# Altium PCB Leaf_Adapter.PcbDoc
Units mil, origin at the board's own origin, x right, y up, seen from the top; angles counter-clockwise.
Board outline 6220.47 x 4173.23 mil, 2 copper layers (Top Layer, Bottom Layer); 19 components, 19 nets, 157 pads, 11 vias.
Unrouted connection lines stored in the file: 5.
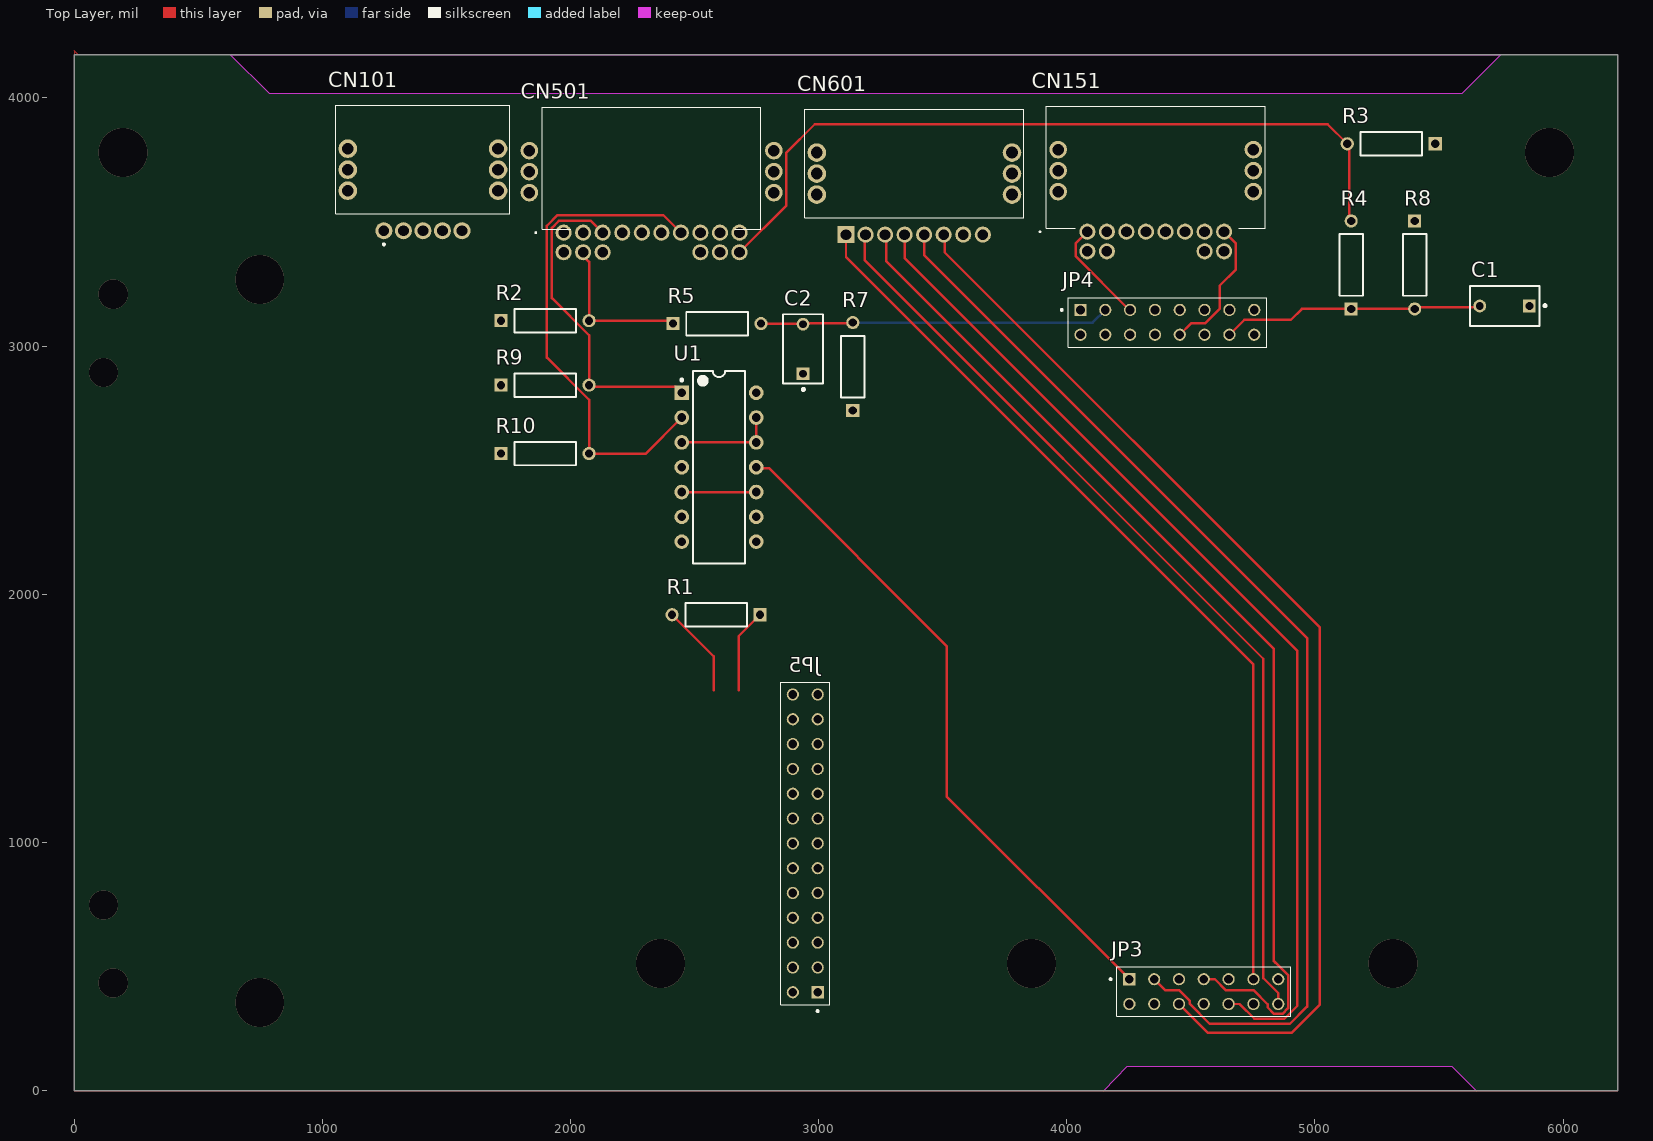
[diagram p0: Top Layer view]
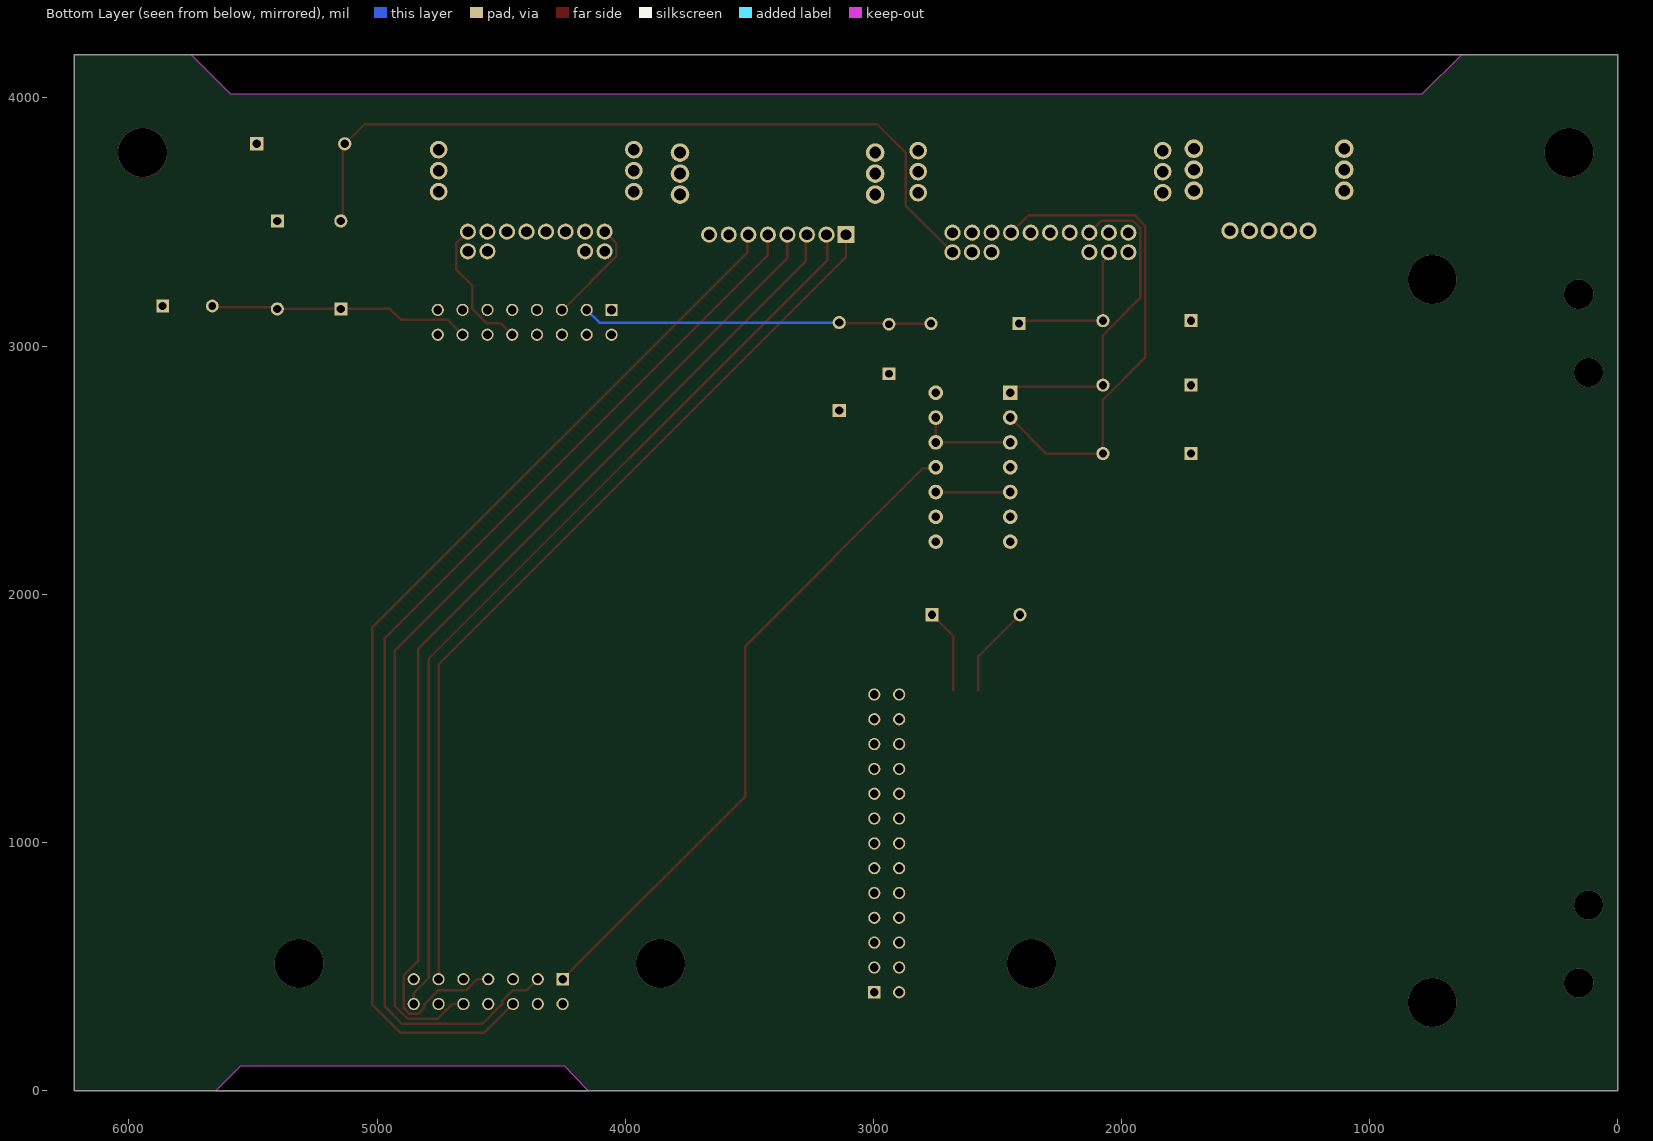
[diagram p1: Bottom Layer view, seen from below]

## Layer stack, top to bottom
Top Solder: solder mask 0.4, Solder Resist, Dk 3.5
Top Layer: signal copper 1.4
Dielectric 1: dielectric 12.6, FR-4, Dk 4.8
Bottom Layer: signal copper 1.4
Bottom Solder: solder mask 0.4, Solder Resist, Dk 3.5

## Board outline
0,0 6220.47,0 6220.47,4173.23 0,4173.23
cut-out: 4149.61,0 4244.09,98.43 5551.18,98.43 5649.61,0
cut-out: 787.4,4015.75 629.92,4173.23 5748.03,4173.23 5590.55,4015.75

## Design rules (kind name [scope] priority, off if disabled: settings)
Clearance [All] p1: gap=10 ignorepadtopadclearanceinfootprint=FALSE except(0: Arc-Hole Track-Hole SMDPad-Hole THPad-Hole Via-Hole Fill-Hole Poly-Hole Region-Hole Text-Hole)
PolygonConnect [All] p1: connectstyle=Relief reliefconductorwidth=10 reliefentries=4 polygonreliefangle="90 Angle" airgapwidth=10
RoutingVias [All] p1: holewidth=28 width=50 viastyle="Through Hole" minholewidth=28 minwidth=50 maxholewidth=28 maxwidth=50
SolderMaskExpansion [All] p1: expansion=4 istentingtop=FALSE
Width [All] p1: maxlimit=10 minlimit=10 preferedwidth=10
30 further rules are at their usual default settings.

## Components (designator, comment, footprint, x,y, rotation, side; value= is the part's Value field where it differs from the comment)
C1 "C330C105M5U5TA" KEMT-C330C105M5U5TA 5763.78,3161.42 r180 top
C2 "C330C105M5U5TA" KEMT-C330C105M5U5TA 2937.01,2988.19 r90 top
CN101 "GT8E-5P-DS" GT8E5PDS 1248.03,3464.57 r180 top
CN151 "GT8E-12DP-DS" GT8E12DPDS 4082.68,3460.63 r180 top
CN501 "GT8E-16DP-DS" GT8E16DPDS 2326.77,3456.69 r180 top
CN601 "GT8E-8P-DS" GT8E8PDS 3110.24,3448.82 r180 top
JP3 "215309-7" TE_215309-7 4251.97,448.82 r0 top
JP4 "215307-8" TE_215307-8 4055.12,3145.67 r0 top
JP5 "1-215309-3" TE_1-215309-3 2996.06,396.06 r90 top
R1 "MRS25000C1200FC100" RESA60-630X240 2586.61,1917.32 r180 top
R2 "MFR-25FBF5210K" RESA60-630X240 1897.64,3102.36 r0 top
R3 "MFR-25FBF5210K" RESA60-630X240 5307.09,3814.96 r180 top
R4 "MFR-25FBF5210K" RESA60-630X240 5145.67,3326.77 r90 top
R5 "MFR-25FBF5210K" RESA60-630X240 2590.55,3090.55 r0 top
R7 "MRS25000C4702FC100" RESA60-630X240 3137.8,2917.32 r90 top
R8 "MRS25000C4702FC100" RESA60-630X240 5401.57,3326.77 r270 top
R9 "MFR-25FBF52-1K" RESA60-630X240 1897.64,2842.52 r0 top
R10 "MFR-25FBF52-1K" RESA60-630X240 1897.64,2566.93 r0 top
U1 "SN74LS00N" N0014A 2598.43,2511.81 r0 top

## Footprints (in the part's own frame and the unit in brackets; to place one, negate y for a bottom-side part, rotate by r counter-clockwise, add the part's x,y. Pads: shape width x height; smd on the part's side, far side on the other; paste and mask are expansions set on the pad)
GT8E5PDS [mm]
  round 1.75 hole 1.1: 1(0,0) 2(-2,0) 3(-4,0) 4(-6,0) 5(-8,0)
  round 1.9 hole 1.2: 6(3.69,-4.1) 7(3.69,-6.25) 8(3.69,-8.4) 9(-11.69,-4.1) 10(-11.69,-6.25) 11(-11.69,-8.4)
  silkscreen extent -12.9,-12.85 4.9,1.5, body extent -12.9,-12.85 4.9,0.45, height 7.1
GT8E8PDS [mm]
  rect 1.75x1.75 hole 1.1: 1(0,0)
  round 1.65 hole 1.1: 2(-2,0) 3(-4,0) 4(-6,0) 5(-8,0) 6(-10,0) 7(-12,0) 8(-14,0)
  round 1.9 hole 1.2: 9(2.99,-4.1) 10(2.99,-6.25) 11(2.99,-8.4) 12(-16.99,-4.1) 13(-16.99,-6.25) 14(-16.99,-8.4)
  silkscreen extent -18.2,-12.85 4.2,-1.75, body extent -18.2,-12.85 4.2,0.45, height 7.1
GT8E12DPDS [mm]
  round 1.65 hole 1.1: 1(0,0) 2(-2,0) 3(-4,0) 4(-6,0) 5(-8,0) 6(-10,0) 7(-12,0) 8(-14,0) 9(0,2) 10(-2,2) 11(-12,2) 12(-14,2)
  round 1.8 hole 1.2: MH1(2.99,-8.4) MH2(2.99,-6.25) MH3(2.99,-4.1) MH4(-16.99,-8.4) MH5(-16.99,-6.25) MH6(-16.99,-4.1)
  silkscreen extent -18.2,-12.85 4.9,0.05, body extent -18.2,-12.85 4.2,2.45, height 10.6
GT8E16DPDS [mm]
  round 1.65 hole 1.1: 1(9,0) 2(7,0) 3(5,0) 4(3,0) 5(1,0) 6(-1,0) 7(-3,0) 8(-5,0) 9(-7,0) 10(-9,0) 11(9,2) 12(7,2) 13(5,2) 14(-5,2) 15(-7,2) 16(-9,2)
  round 1.8 hole 1.2: MH1(12.515,-8.4) MH2(12.515,-6.25) MH3(12.515,-4.1) MH4(-12.515,-8.4) MH5(-12.515,-6.25) MH6(-12.515,-4.1)
  silkscreen extent -11.2,-12.85 11.9,0.05, body extent -13.65,-12.9 13.65,-0.3, height 10.5
KEMT-C330C105M5U5TA [mm] "THD, 2-Leads, Body 7.11x4.07mm"
  rect 1.3x1.3 hole 0.8: 1(-2.54,0)
  round 1.3 hole 0.8: 2(2.54,0)
  silkscreen extent -4.27,-2.03 3.55,2.03, body extent -3.55,-2.03 3.55,2.03, height 9.14
N0014A [mm] "DIP, 14-Leads, Body 19.7x6.6mm, Pitch 2.54mm"
  rect 1.5x1.5 hole 0.9: 1(-3.81,7.62)
  round 1.5 hole 0.9: 2(-3.81,5.08) 3(-3.81,2.54) 4(-3.81,0) 5(-3.81,-2.54) 6(-3.81,-5.08) 7(-3.81,-7.62) 8(3.81,-7.62) 9(3.81,-5.08) 10(3.81,-2.54) 11(3.81,0) 12(3.81,2.54) 13(3.81,5.08) 14(3.81,7.62)
  silkscreen extent -3.93,-9.85 2.65,9.85, body extent -3.95,-9.85 3.95,9.85, height 5.08
RESA60-630X240 [mm] "Axial Resistor, 2-Leads, Dia 2.4mm, Body Length 6.3mm"
  rect 1.35x1.35 hole 0.85: 1(-4.5,0)
  round 1.35 hole 0.85: 2(4.5,0)
  silkscreen extent -3.15,-1.2 3.15,1.2, body extent -3.15,-1.2 3.15,1.2, height 2.4
TE_1-215309-3 [mm]
  rect 1.25x1.25 hole 0.9: 1(0,0)
  round 1.25 hole 0.9: 2(0,2.54) 3(2.54,0) 4(2.54,2.54) 5(5.08,0) 6(5.08,2.54) 7(7.62,0) 8(7.62,2.54) 9(10.16,0) 10(10.16,2.54) 11(12.7,0) 12(12.7,2.54) 13(15.24,0) 14(15.24,2.54) 15(17.78,0) 16(17.78,2.54) 17(20.32,0) 18(20.32,2.54) 19(22.86,0) 20(22.86,2.54) 21(25.4,0) 22(25.4,2.54) 23(27.94,0) 24(27.94,2.54) 25(30.48,0) 26(30.48,2.54)
  silkscreen extent -2.02,-1.26 31.75,3.8, body extent -1.27,-1.26 31.75,3.8, height 8.5
TE_215307-8 [mm]
  rect 1.25x1.25 hole 0.9: 1(0,0)
  round 1.25 hole 0.9: 2(0,-2.54) 3(2.54,0) 4(2.54,-2.54) 5(5.08,0) 6(5.08,-2.54) 7(7.62,0) 8(7.62,-2.54) 9(10.16,0) 10(10.16,-2.54) 11(12.7,0) 12(12.7,-2.54) 13(15.24,0) 14(15.24,-2.54) 15(17.78,0) 16(17.78,-2.54)
  silkscreen extent -2.02,-3.8 19.05,1.26, body extent -1.26,-3.83 19.06,1.23, height 7
TE_215309-7 [mm]
  rect 1.25x1.25 hole 0.9: 1(0,0)
  round 1.25 hole 0.9: 2(0,-2.54) 3(2.54,0) 4(2.54,-2.54) 5(5.08,0) 6(5.08,-2.54) 7(7.62,0) 8(7.62,-2.54) 9(10.16,0) 10(10.16,-2.54) 11(12.7,0) 12(12.7,-2.54) 13(15.24,0) 14(15.24,-2.54)
  silkscreen extent -2.02,-3.8 16.51,1.26, body extent -1.27,-3.8 16.51,1.26, height 8.5

## Part data
C1 C2: library part CMP-2000-06056-1, "Ceramic Capacitor, 1 uF, +/- 20%, 50 V, -10 to 85 degC, 2-Pin THD, RoHS, Bulk", Capacitance=1µF, Manufacturer=Kemet, Operating Temperature=10°C~85°C, Package / Case=Radial, Package Description="2-Pin Through Hole Device, Body 7.11 x 4.07 mm", Ratings=-, Standard Package=250, Temperature Coefficient=Z5U, Tolerance=±20%, Voltage - Rated=50V, Applications=GeneralPurpose, Catalog Drawings=C330(std), Category=Capacitors, Datasheet URL=http://www.kemet.com/Lists/ProductCatalog/Attachments/599/KEM_C1051_GOLDMAX_Z5U.pdf, Datasheet Version=12/2015, Family=CeramicCapacitors, Features=-, Height - Seated (Max)="0.360\"(9.14mm)", Lead Spacing="0.200\"(5.08mm)", Lead Style=Straight, Manufacturer URL=http://www.kemet.com/, Mounting Technology=ThroughHole, Mounting Type=ThroughHole, Online Catalog=GoldenMax™Series, Other Names=399-4390, Package Reference=C330C105M5U5TA, Packaging=Bulk, PCN Design/Specification=C3yySeriesGoldenMaxLeadConfiguration02/Feb/2015, Product Training Modules=CapacitorBasics-TypicalUsesforCapacitors, Series=GoldenMax™, Size / Dimension="0.300\"Lx0.150\"W(7.62mmx3.81mm)", Thickness (Max)=-
CN101 CN151 CN601: "Connector", Manufacturer_Name=Hirose
  CN101: Datasheet Link=https://www.hirose.com/product/en/download_file/key_name/GT8E/category/Catalog/doc_file_id/49379/&file_category_id=4&item_id=35&is_series=1, Height=7mm, Manufacturer_Part_Number=GT8E-5P-DS
  CN151: Datasheet Link=https://www.hirose.com/product/document?clcode=&productname=&series=GT8E&documenttype=Catalog&lang=en&documentid=D49379_en, Height=10.5mm, Manufacturer_Part_Number=GT8E-12DP-DS
  CN601: Datasheet Link=https://www.mouser.co.uk/datasheet/2/185/GT8E_catalog-939506.pdf, Height=7mm, Manufacturer_Part_Number=GT8E-8P-DS
CN501: "Connector", Manufacturer_Name=Hirose, Manufacturer_Part_Number=GT8E-12DP-DS, Datasheet Link=https://www.hirose.com/product/document?clcode=&productname=&series=GT8E&documenttype=Catalog&lang=en&documentid=D49379_en, Height=10.5mm
JP3: "2X7P HV100 REC CON. TE, 8.5MM", Package=None, Availability=Unavailable, Centerline_Pitch="2.54 mm[.1 in]", EU_RoHS_Compliance=Compliant, MF="TE Connectivity", MP=215309-7, Number_of_Positions=7, Price=None, Product_Type=Connector, SnapEDA_Link=https://www.snapeda.com/parts/215309-7/TE%20Connectivity%20AMP%20Connectors/view-part/1233007/?ref=snap, TE_purchase_URL=https://www.te.com/usa-en/product-215309-7.html?te_bu=Cor&te_type=disp&te_campaign=seda_glo_cor-seda-global-disp-prtnr-fy19-seda-model-bom-cta_sma-317_1&elqCampaignId=32493
JP4 JP5: Package=None, Availability=Unavailable, Price=None
  JP4: MP=215307-8
  JP5: MP=1-215309-3
R1: "RES 120 OHM 1% 0.6W AXIAL", Manufacturer="Vishay Beyschlag/Draloric/BC Components", Max Operating Temperature=155degC, Min Operating Temperature=-55degC, Package=Axial, Power Rating=0.6W, Resistance=120, Supplier Part Number 1=BC4562CT-ND, Temperature Coefficient=±50ppm/°C, Tolerance=1%, Composition=MetalFilm, Datasheet URL=https://www.vishay.com/docs/28724/mrs16m25.pdf, Mount=ThroughHole, Mounting Technology=ThroughHole, Number of Terminations=2, Supplier 1=Digi-Key, Termination=Axial
R2 R3 R4 R5: library part CMP-1659-00074-2, "Axial Resistor, 10 KOhm, +/- 1%, 0.25 W, -55 to 155 degC, 2-Pin THD, RoHS, Bulk", Case\/Package=Axial, Manufacturer=Yageo, Max Operating Temperature=155degC, Max Power Dissipation=250mW, Min Operating Temperature=-55degC, Package Description="2-Pin Axial Lead, Dia 2.4 mm, Body Length 6.3 mm", Package Quantity=200, Package Reference=MFR-25, Resistance=10K, Temperature Coefficient=100ppm\/degreesC, Tolerance=1%, Voltage Rating=250V, Voltage Rating (DC)=200V, Composition=MetalFilm, Datasheet URL=http://www.yageo.com/documents/recent/Yageo%20LR_MFR_2013.pdf, Datasheet Version=04/2013, Lead Free=LeadFree, Length=0.248inch, Manufacturer URL=http://www.yageo.com/, Military Standard=Not, Mount=ThroughHole, Mounting Technology=ThroughHole, Number of Terminations=2, Packaging=Bulk, Power Rating=250mW, RoHSCompliant=True, Termination=Axial
R7 R8: "RES 47K OHM 0.6W 1% AXIAL", Manufacturer="Vishay Beyschlag/Draloric/BC Components", Max Operating Temperature=155degC, Min Operating Temperature=-55degC, Package=Axial, Power Rating=0.6W, Resistance=47K, Supplier Part Number 1=BC4177CT-ND, Temperature Coefficient=±50ppm/°C, Tolerance=1%, Composition=MetalFilm, Datasheet URL=https://www.vishay.com/docs/28724/mrs16m25.pdf, Mount=ThroughHole, Mounting Technology=ThroughHole, Number of Terminations=2, Supplier 1=Digi-Key, Termination=Axial
R9 R10: library part CMP-1659-00075-1, "Axial Resistor, 1 KOhm, +/- 1%, 250 mW, -55 to 155 degC, 2-Pin THD, RoHS, Bulk", Case\Package=Axial, Max Operating Temperature="155 degC", Min Operating Temperature="-55 degC", Package Quantity=200, Power Rating="250 mW", Resistance=1K, Tolerance=1%, Voltage Rating="250 V", ComponentLink1Description="Manufacturer URL", ComponentLink1URL=http://www.yageo.com/, ComponentLink2Description=Datasheet, ComponentLink2URL=http://www.yageo.com/documents/recent/Yageo%20LR_MFR_2013.pdf, DatasheetVersion=Apr-13, Length="0.248 inch", PackageDescription="2-Pin Axial Lead, Dia 2.4 mm, Body Length 6.3 mm", PackageReference=MFR-25, Packaging=Bulk, RoHSCompliant=true
U1: "IC GATE NAND 4CH 2-INP 14DIP", Current - Output High, Low="400µA, 8mA", Manufacturer="Texas Instruments", Operating Temperature="0°C ~ 70°C (TA)", Supplier Part Number 1=296-1626-ND, Voltage - SupplyParameter 1="4.75V ~ 5.25V", Logic Level - High=2V, Logic Level - Low=0.8V, Logic Type="NAND Gate", Max Propagation Delay @ V, Max CL="15ns @ 5V, 15pF", Mounting Type="Through Hole", Number of Inputs=2, Supplier 1=Digi-Key

## Via types
v1: diameter 196.85, hole 196.85, Top Layer to Bottom Layer, 7 vias
v2: diameter 118.11, hole 118.11, Top Layer to Bottom Layer, 4 vias

## Nets (pads, with @x,y where several pads share a name; then routed paths per layer and width w, separated by ;. In a path a pad name is that pad's centre, name@x,y a point inside that pad or via, vN(x,y) a via of type N, cw(c..) or ccw(c..) an arc to the next point about the centre after c; other vN are vias at no path point)
GND: C1.1 C2.1 CN151.9 CN151.10 CN151.11 CN151.12 CN501.9 CN501.MH5 JP3.4 JP3.5 JP3.8 JP3.9 JP3.12 JP3.13 JP4.1 JP4.2 JP4.6 JP4.7 JP4.8 JP4.9 JP4.11 JP4.12 JP4.15 JP4.16 R2.1 R3.1 R7.1 R8.1 R9.1 R10.1 U1.4 U1.5 U1.7 U1.9 U1.10 U1.14 | length 300
  Top Layer w10: U1.5 U1.10
NetC1_2: C1.2 JP4.14 R4.1 R8.2 | length 1056.6
  Top Layer w10: JP4.14 4715.51,3106.06 4903.34,3106.06 4946.88,3149.61 R4.1 R8.2 5407.48,3155.51 5657.87,3155.51 C1.2
NetC2_2: C2.2 JP4.3 R5.2 R7.2 | length 1416.1
  Top Layer w10: R5.2@2770.47,3093.31 R5.2 2768.9,3089.37 2935.83,3089.37 C2.2 2940.16,3091.34 3134.65,3091.34 R7.2
  Bottom Layer w10: R7.2 4103.94,3094.49 JP4.3
NetCN151_1: CN151.1 JP4.5 | length 427.7
  Top Layer w10: CN151.1 4035.2,3413.15 4035.2,3362.22 4251.75,3145.67 JP4.5
NetCN151_8: CN151.8 JP4.10 | length 561.1
  Top Layer w10: JP4.10 4500.67,3091.22 4556.68,3091.22 4615.51,3150.05 4615.51,3242.89 4681.34,3308.72 4681.34,3413.15 CN151.8
NetCN501_3: CN501.3 R9.2 U1.1 | length 1318.4
  Top Layer w10: CN501.3 2082.44,3504.17 1952.77,3504.17 1924.96,3476.36 1924.96,3193.41 2074.8,3043.57 R9.2 2080.98,2836.34 2423.9,2836.34 U1.1
NetCN501_7: CN501.7 R10.2 U1.2 | length 2008.8
  Top Layer w10: CN501.7 2374.02,3527.56 1947.88,3527.56 1904.96,3484.64 1904.96,2953.57 2074.8,2783.72 R10.2 2303.54,2566.93 U1.2
NetCN501_12: CN501.12 R2.2 R5.1 | length 628.8
  Top Layer w10: CN501.12 2051.18,3363.08 2074.8,3339.46 R2.2 2401.57,3102.36 R5.1
NetCN501_16: CN501.16 R3.2 R4.2 | length 3162.1
  Top Layer w10: CN501.16 2869.92,3566.77 2869.92,3779.37 2984.25,3893.7 5051.18,3893.7 R3.2 5137.8,3807.09 5137.8,3511.81 R4.2 ; R3.2@5138.18,3795.03 5138.18,3814.91 R3.2@5141.73,3818.46
NetCN601_1: CN601.1 JP3.11 | length 3680
  Top Layer w10: CN601.1 3110.24,3358.27 4751.97,1716.54 JP3.11
NetCN601_2: CN601.2 JP3.14 | length 3792.1
  Top Layer w10: CN601.2 3185.04,3444.88 3185.04,3346.46 4791.57,1739.92 4791.57,453.2 4851.97,392.81 JP3.14
NetCN601_3: CN601.3 JP3.7 | length 4203.4
  Top Layer w10: CN601.3 3271.65,3444.88 3271.65,3342.52 4834.65,1779.53 4834.65,521.61 4840.5,515.75 4841.05,515.75 4891.57,465.22 4891.57,332.41 4868.37,309.21 4835.56,309.21 4809.7,335.08 4809.7,347.1 4753.53,403.27 4641.51,403.27 4595.96,448.82 JP3.7
NetCN601_4: CN601.4 JP3.10 | length 4086.3
  Top Layer w10: CN601.4 3346.46,3354.33 4929.13,1771.65 4929.13,341.69 4876.66,289.21 4755.56,289.21 4695.96,348.82 JP3.10
NetCN601_5: CN601.5 JP3.3 | length 4476.2
  Top Layer w10: CN601.5 3425.2,3366.14 4968.5,1822.83 4968.5,338.58 4899.13,269.21 4575.56,269.21 4494.55,350.23 4494.55,362.25 4453.53,403.27 4397.52,403.27 JP3.3
NetCN601_6: CN601.6 JP3.6 | length 4393.5
  Top Layer w10: CN601.6 3507.87,3444.88 3507.87,3377.95 5019.69,1866.14 5019.69,346.46 4905.51,232.28 4568.5,232.28 JP3.6
NetJP3_1: JP3.1 U1.11 | length 2713.2
  Top Layer w10: U1.11 2752.36,2507.87 2799.21,2507.87 3515.79,1791.3 3515.79,1185 JP3.1
NetJP5_25: JP5.25 R1.2 | length 373.4
  Top Layer w10: R1.2 2577.17,1749.61 2577.17,1613.39
NetJP5_26: JP5.26 R1.1 | length 339.8
  Top Layer w10: 2677.17,1613.39 2677.17,1830.71 R1.1
NetU1_3: U1.3 U1.12 U1.13 | length 400
  Top Layer w10: U1.3 U1.12 U1.13
pads on no net: CN101.1 CN101.2 CN101.3 CN101.4 CN101.5 CN101.6 CN101.7 CN101.8 CN101.9 CN101.10 CN101.11 CN151.2 CN151.3 CN151.4 CN151.5 CN151.6 CN151.7 CN151.MH1 CN151.MH2 CN151.MH3 CN151.MH4 CN151.MH5 CN151.MH6 CN501.1 CN501.2 CN501.4 CN501.5 CN501.6 CN501.8 CN501.10 CN501.11 CN501.13 CN501.14 CN501.15 CN501.MH1 CN501.MH2 CN501.MH3 CN501.MH4 CN501.MH6 CN601.7 CN601.8 CN601.9 CN601.10 CN601.11 CN601.12 CN601.13 CN601.14 JP3.2 JP4.4 JP4.13 JP5.1 JP5.2 JP5.3 JP5.4 JP5.5 JP5.6 JP5.7 JP5.8 JP5.9 JP5.10 JP5.11 JP5.12 JP5.13 JP5.14 JP5.15 JP5.16 JP5.17 JP5.18 JP5.19 JP5.20 JP5.21 JP5.22 JP5.23 JP5.24 U1.6 U1.8
copper on no net:
  other v1: 748.03,354.33 2362.2,511.81 3858.27,511.81 5314.96,511.81 748.03,3267.72 196.85,3779.53 5944.88,3779.53
  other v2: 157.48,433.07 118.11,748.03 118.11,2893.7 157.48,3208.66

## Polygon pours and split planes (outlines as drawn)
GND on Top Layer "NONET_L-01_P-001" (solid, shelved, pour order 1): 0,0 6220.47,0 6220.47,4173.23 15.75,4173.23 0,4188.98
no net on Top Layer "NONET_L-01_P-001" (solid, shelved, pour order 0): 0,0